# Altium PCB JLINK_V9_RST.PcbDoc
Units mm, origin at the board's own origin, x right, y up, seen from the top; angles counter-clockwise.
Board outline 35.79 x 32.89 mm, 2 copper layers (Top Layer, Bottom Layer); 49 components, 39 nets, 208 pads, 107 vias.
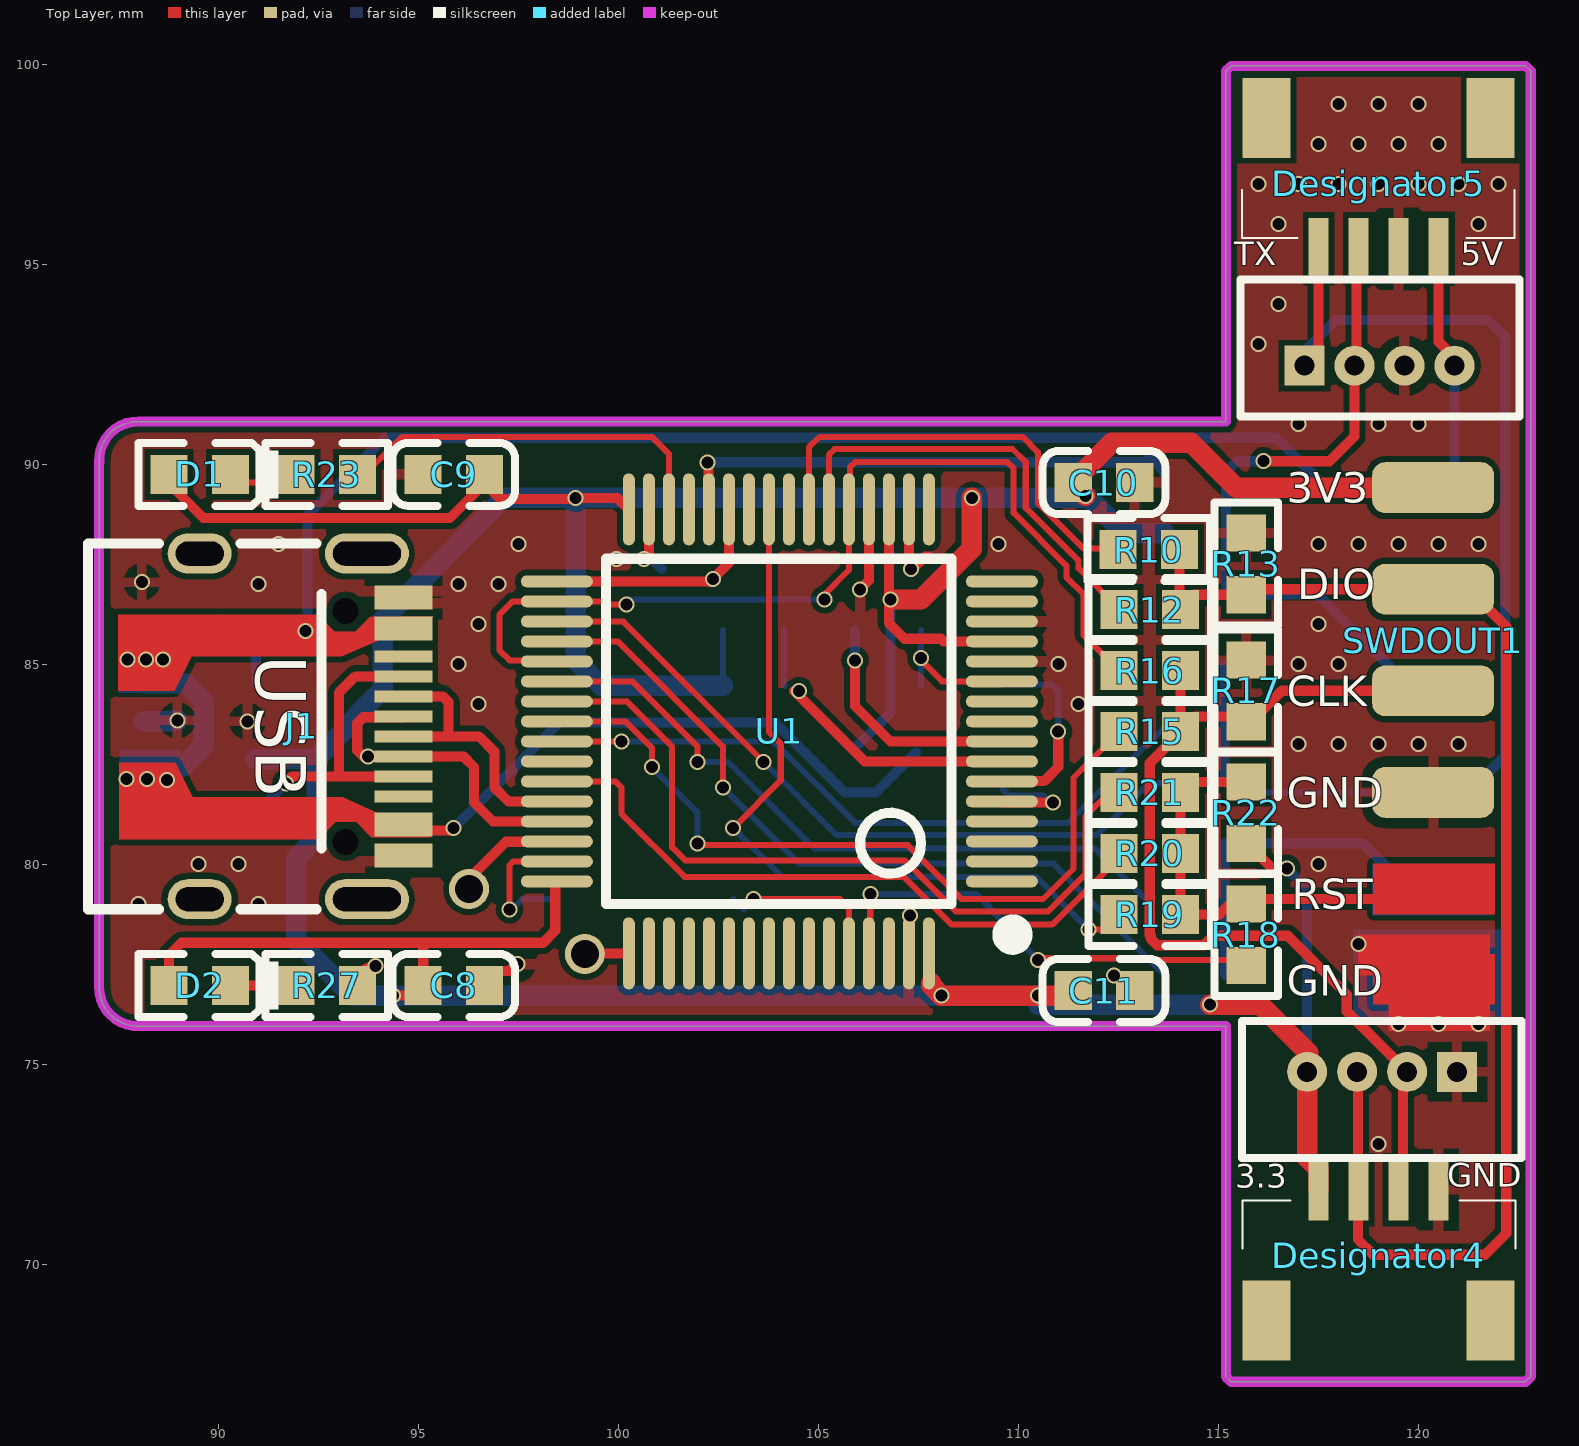
[diagram p0: Top Layer view]
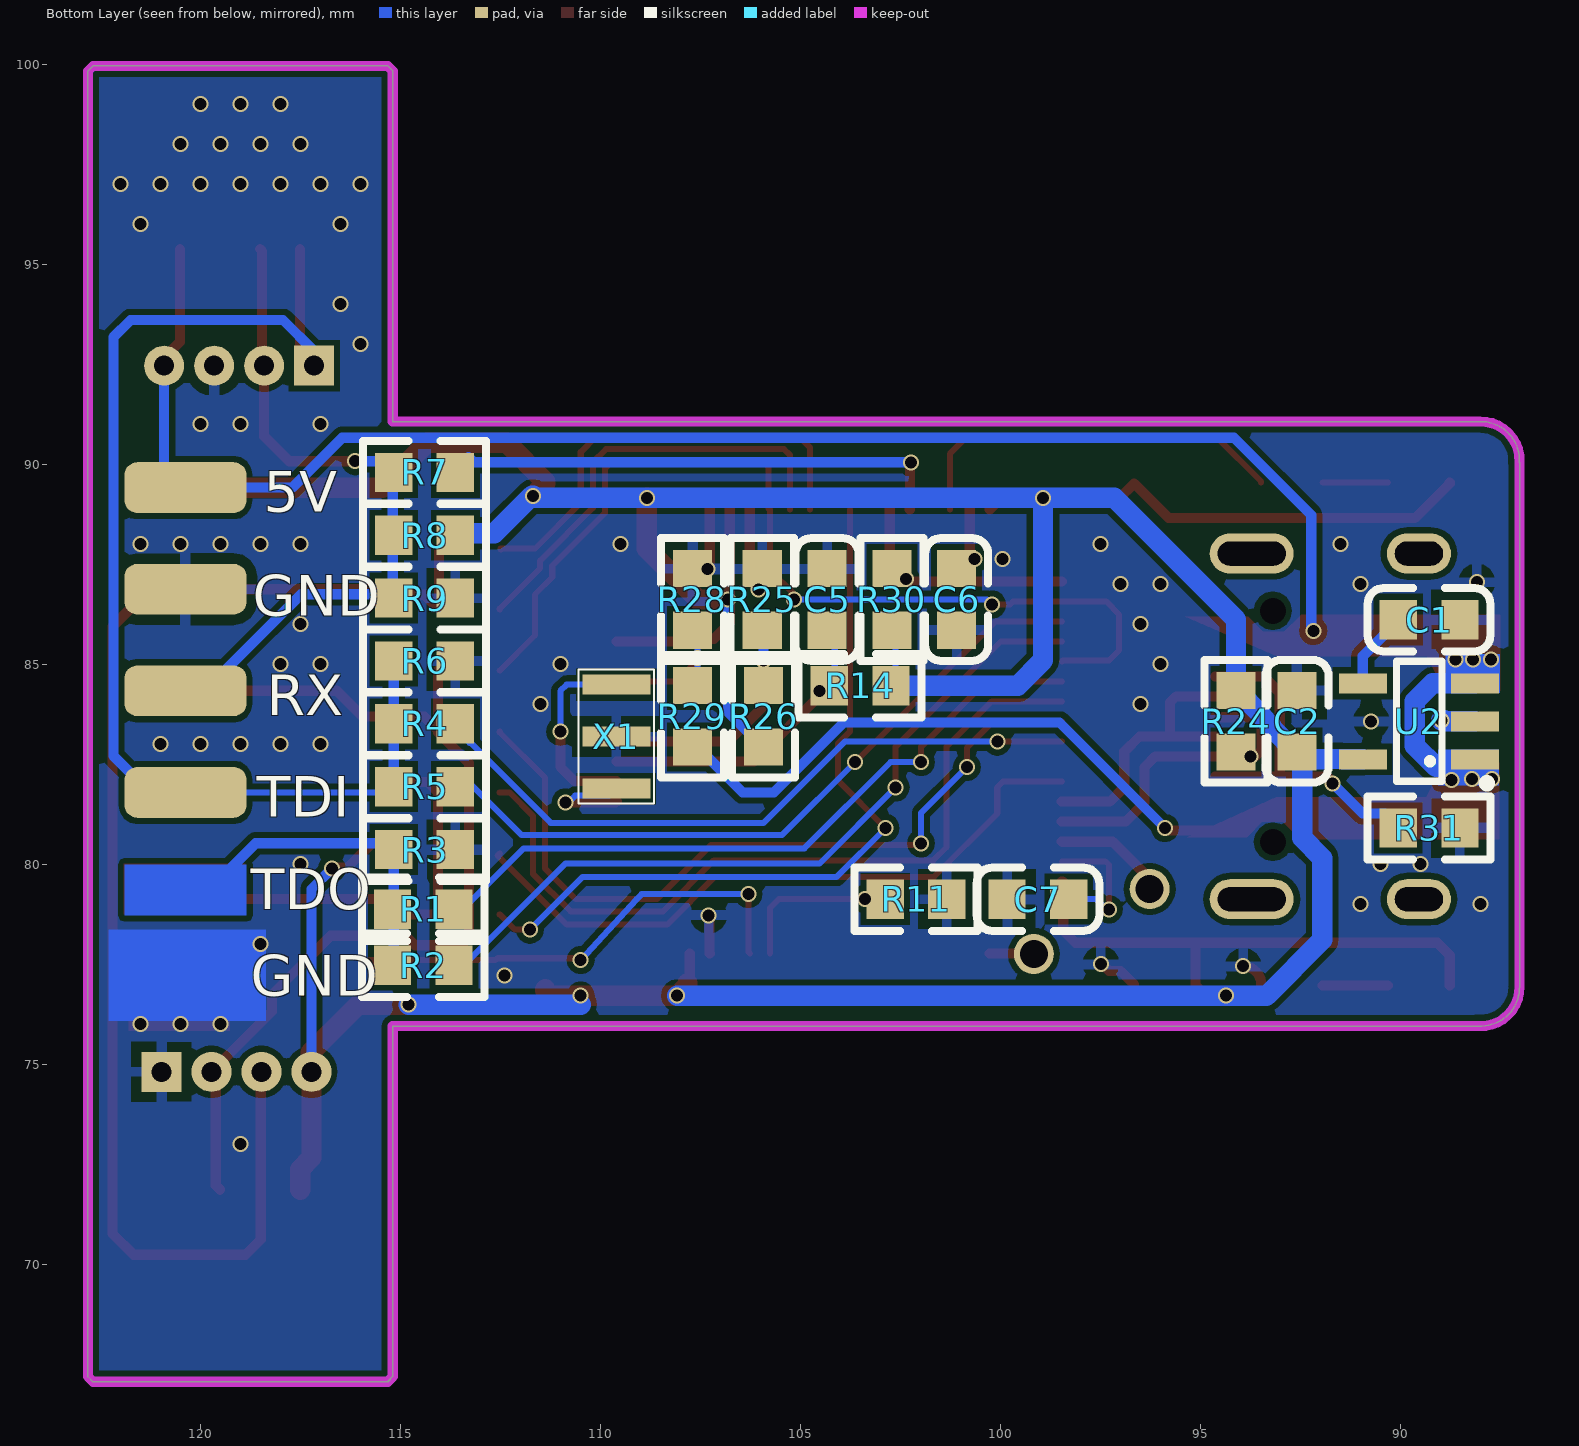
[diagram p1: Bottom Layer view, seen from below]
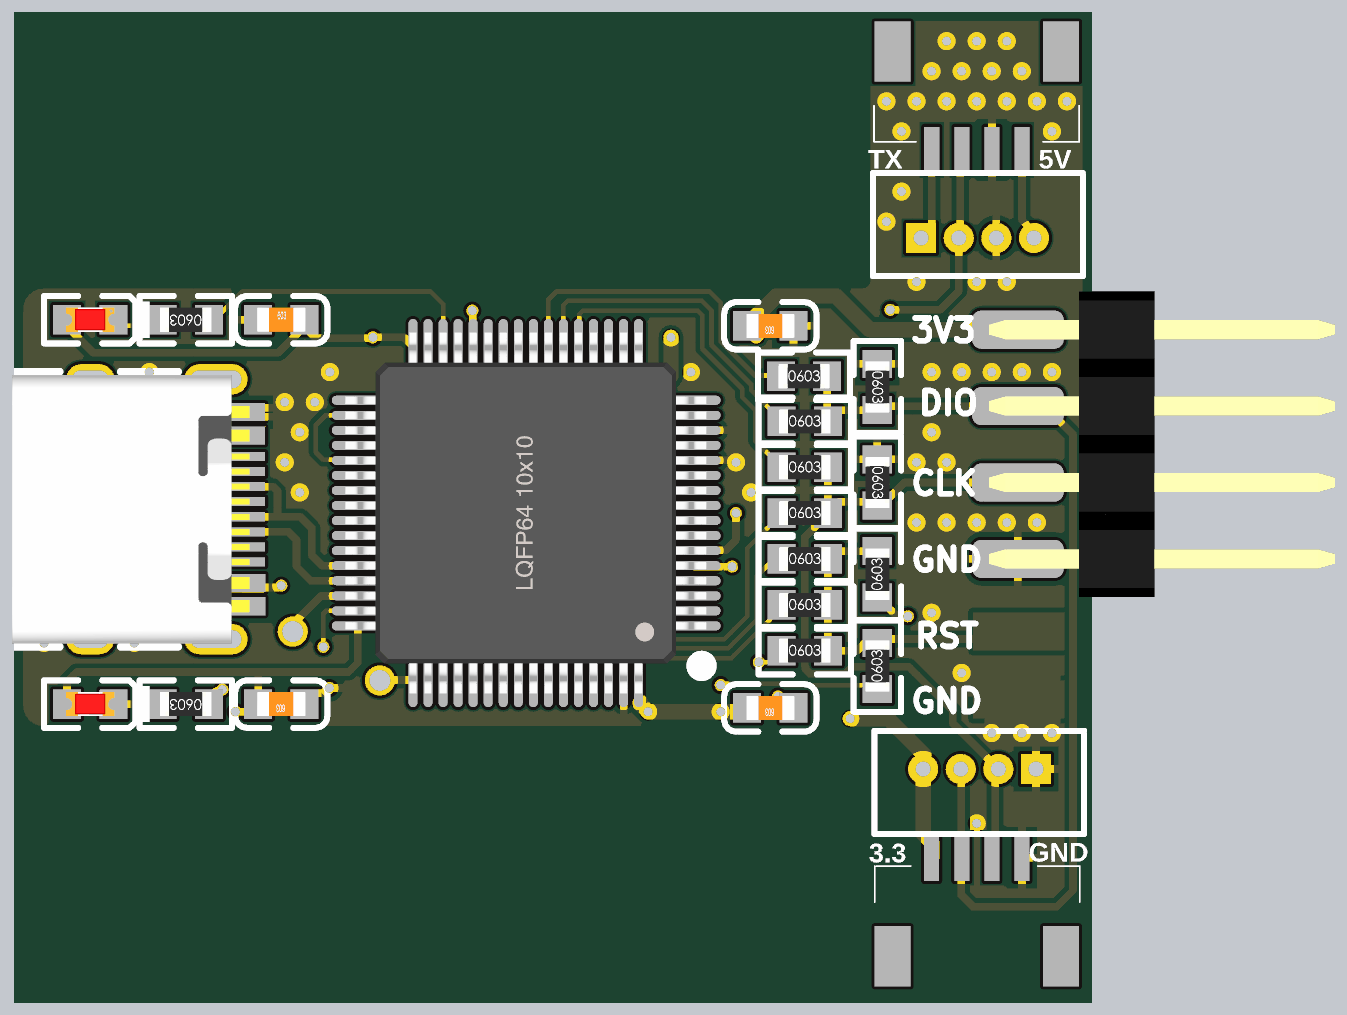
[diagram p2: 3D render of the assembled board from above, using the file's embedded part models]
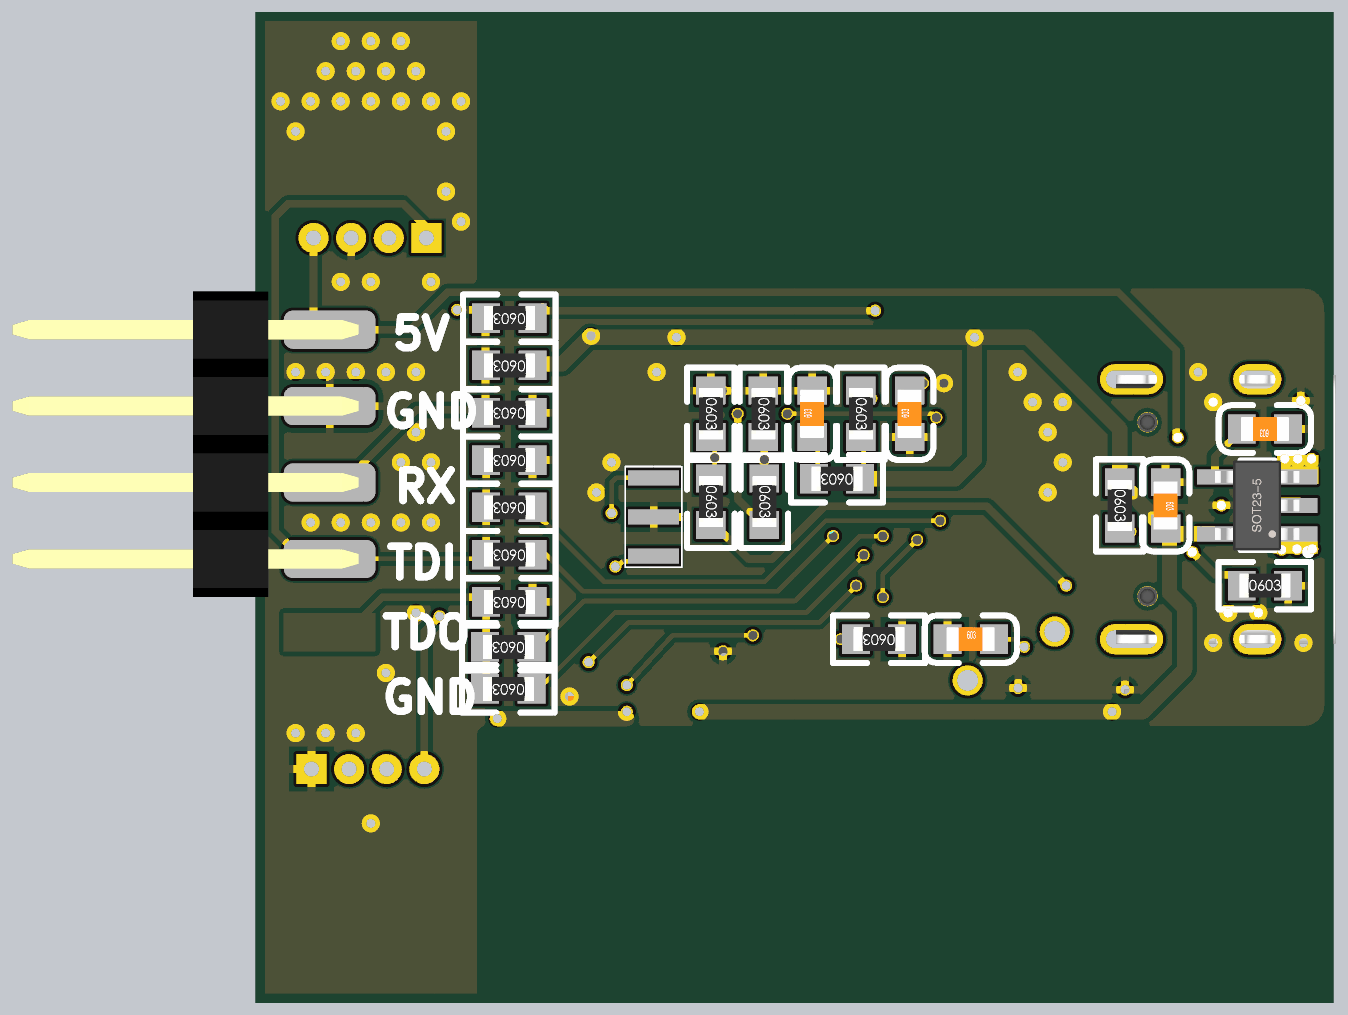
[diagram p3: 3D render of the assembled board from below, using the file's embedded part models]

## Layer stack, top to bottom
Top Solder: solder mask 0.0102, Solder Resist, Dk 3.5
Top Layer: signal copper 0.0356
Dielectric 1: dielectric 0.32, FR-4, Dk 4.8
Bottom Layer: signal copper 0.0356
Bottom Solder: solder mask 0.0102, Solder Resist, Dk 3.5

## Board outline
87.02,76.939 ccw(c87.986,76.913) 88.036,75.949 88.011,75.948 115.189,75.948 115.189,67.185 115.316,67.058 122.682,67.058 122.809,67.185 122.809,99.824 122.682,99.951 115.316,99.951 115.189,99.824 115.189,91.061 88.011,91.061 ccw(c87.986,90.096) 87.021,90.045 87.02,90.045

## Design rules (kind name [scope] priority, off if disabled: settings)
Clearance [All] p1: gap=0.152 ignorepadtopadclearanceinfootprint=FALSE
PolygonConnect [All] p1: connectstyle=Relief reliefconductorwidth=0.254 reliefentries=4 polygonreliefangle="90 Angle" airgapwidth=0.254
RoutingVias [All] p1: holewidth=0.3 width=0.4 viastyle="Through Hole" minholewidth=0.3 minwidth=0.4 maxholewidth=0.3 maxwidth=0.4
SolderMaskExpansion [All] p1: expansion=0.102
Width [All] p1: maxlimit=0.508 minlimit=0.152 preferedwidth=0.254
30 further rules are at their usual default settings.

## Components (designator, comment, footprint, x,y, rotation, side; value= is the part's Value field where it differs from the comment)
C1 "2.2UF" LC-0603_C 89.281,86.108 r0 bottom value=2.2uf
C2 "104" LC-0603_C 92.583,83.568 r270 bottom
C5 "104" LC-0603_C 104.331,86.614 r90 bottom
C6 "2.2UF" LC-0603_C 101.092,86.614 r90 bottom value=2.2uf
C7 "2.2UF" LC-0603_C 99.06,79.121 r180 bottom value=2.2uf
C8 "104" LC-0603_C 95.885,76.964 r180 top
C9 "104" LC-0603_C 95.885,89.74 r0 top
C10 "104" LC-0603_C 112.141,89.537 r180 top
C11 "104" LC-0603_C 112.141,76.837 r180 top
D1 "白灯 0603" 0603_LED_S1 89.535,89.74 r180 top
D2 "白灯 0603" 0603_LED_S1 89.535,76.964 r180 top
Designator4 "Comment" 1.0MM插座_4P 116.205,68.582 r0 top
Designator5 "Comment" 1.0MM插座_4P 121.807,98.654 r180 top
J1 "USB type C" "USB Type-C-16Pin_A" 89.535,83.441 r270 top
R1 "100R" LC-0603_R 114.427,78.867 r0 bottom value=101
R2 "100R" LC-0603_R 114.427,77.47 r0 bottom value=101
R3 "NC" LC-0603_R 114.395,80.361 r0 bottom value=220K
R4 "100R" LC-0603_R 114.395,83.504 r0 bottom value=101
R5 "100R" LC-0603_R 114.395,81.933 r0 bottom value=101
R6 "10K" LC-0603_R 114.395,85.076 r0 bottom
R7 "100R" LC-0603_R 114.395,89.791 r0 bottom value=101
R8 "10K" LC-0603_R 114.395,88.219 r0 bottom
R9 "10K" LC-0603_R 114.395,86.648 r0 bottom
R10 "100R" LC-0603_R 113.26,87.861 r0 top value=101
R11 "10K" LC-0603_R 102.108,79.121 r0 bottom value=10K.
R12 "100R" LC-0603_R 113.284,86.36 r0 top value=101
R13 "10K" LC-0603_R 115.697,87.503 r270 top
R14 "10K" LC-0603_R 103.505,84.455 r0 bottom
R15 "100R" LC-0603_R 113.284,83.312 r0 top value=101
R16 "100R" LC-0603_R 113.284,84.836 r0 top value=101
R17 "10K" LC-0603_R 115.697,84.328 r270 top
R18 "10K" LC-0603_R 115.697,78.232 r90 top
R19 "100R" LC-0603_R 113.284,78.74 r0 top value=101
R20 "100R" LC-0603_R 113.284,80.264 r0 top value=101
R21 "10K" LC-0603_R 113.284,81.788 r0 top value=101
R22 "10K" LC-0603_R 115.697,81.28 r90 top
R23 "1K" LC-0603_R 92.71,89.74 r180 top value=102
R24 "1.5K" LC-0603_R 94.107,83.568 r270 bottom
R25 "10K" LC-0603_R 105.95,86.614 r270 bottom
R26 "10K" LC-0603_R 105.918,83.693 r270 bottom
R27 "1K" LC-0603_R 92.71,76.964 r180 top value=102
R28 "10K" LC-0603_R 107.696,86.614 r270 bottom value=103
R29 "10K" LC-0603_R 107.696,83.693 r270 bottom
R30 "10K" LC-0603_R 102.711,86.614 r270 bottom
R31 "10K" LC-0603_R 89.281,80.901 r180 bottom
SWDOUT1 "HDR2x6_2.54" HDR2X4_2.54_180H 120.371,89.41 r0 top
U1 "STM32F205RET6" "LQFP64 10x10_N" 104.013,83.314 r90 top
U2 "RT9193-3.3" SOT23-5N 89.538,83.568 r90 bottom
X1 "8MHz" 3脚晶振 109.601,83.185 r270 bottom

## Footprints (in the part's own frame and the unit in brackets; to place one, negate y for a bottom-side part, rotate by r counter-clockwise, add the part's x,y. Pads: shape width x height; smd on the part's side, far side on the other; paste and mask are expansions set on the pad)
1.0MM插座_4P [mm] "间距1.0mm"
  rect 0.5x1.55 smd: 1(4.3,3.275) 2(3.3,3.275) 3(2.3,3.275) 4(1.3,3.275)
  rect 1.2x2 smd: 5(0,0) 6(5.6,0)
  silkscreen extent -0.6,1.8 6.22,3
3脚晶振 [mm]
  rect 0.5x1.7 smd: 1(1.3,0) 2(-1.3,0) 3(0,0)
  silkscreen extent -1.68,-0.94 1.68,0.94
0603_LED_S1 [mm]
  rect 0.93x0.98 smd: A(0.77,0) K(-0.77,0)
  silkscreen extent -1.97,-0.79 1.54,0.79, body extent -0.8,-0.4 0.8,0.4, height 0.6
HDR2X4_2.54_180H [mil]
  rrect50% 120x50 smd: 1(0,0) 3(0,-100) 5(0,-200) 7(0,-300)
  rrect50% 120x50 smd far side: 2(0,0) 4(0,-100) 6(0,-200) 8(0,-300)
  body extent -38,-350 415,50, height 78
LC-0603_C [mm]
  rect 0.93x0.98 smd: 1(-0.77,0) 2(0.77,0)
  silkscreen extent -1.53,-0.79 1.54,0.79, body extent -0.8,-0.4 0.8,0.4, height 0.3
LC-0603_R [mm]
  rect 0.93x0.98 smd: 1(-0.77,0) 2(0.77,0)
  silkscreen extent -1.53,-0.79 1.54,0.79, body extent -0.85,-0.4 0.85,0.4, height 0.56
"LQFP64 10x10_N" [mm] "64脚，体宽10x10mm，脚距0.5mm"
  oval 0.3x1.8 smd: 1(-3.75,-5.575) 2(-3.25,-5.575) 3(-2.75,-5.575) 4(-2.25,-5.575) 5(-1.75,-5.575) 6(-1.25,-5.575) 7(-0.75,-5.575) 8(-0.25,-5.575) 9(0.25,-5.575) 10(0.75,-5.575) 11(1.25,-5.575) 12(1.75,-5.575) 13(2.25,-5.575) 14(2.75,-5.575) 15(3.25,-5.575) 16(3.75,-5.575) 33(3.75,5.55) 34(3.25,5.55) 35(2.75,5.55) 36(2.25,5.55) 37(1.75,5.55) 38(1.25,5.55) 39(0.75,5.55) 40(0.25,5.55) 41(-0.25,5.55) 42(-0.75,5.55) 43(-1.25,5.55) 44(-1.75,5.55) 45(-2.25,5.55) 46(-2.75,5.55) 47(-3.25,5.55) 48(-3.75,5.55)
  oval 1.8x0.3 smd: 17(5.55,-3.75) 18(5.55,-3.25) 19(5.55,-2.75) 20(5.55,-2.25) 21(5.55,-1.75) 22(5.55,-1.25) 23(5.55,-0.75) 24(5.55,-0.25) 25(5.55,0.25) 26(5.55,0.75) 27(5.55,1.25) 28(5.55,1.75) 29(5.55,2.25) 30(5.55,2.75) 31(5.55,3.25) 32(5.55,3.75) 49(-5.55,3.75) 50(-5.55,3.25) 51(-5.55,2.75) 52(-5.55,2.25) 53(-5.55,1.75) 54(-5.55,1.25) 55(-5.55,0.75) 56(-5.55,0.25) 57(-5.55,-0.25) 58(-5.55,-0.75) 59(-5.55,-1.25) 60(-5.55,-1.75) 61(-5.55,-2.25) 62(-5.55,-2.75) 63(-5.55,-3.25) 64(-5.55,-3.75)
  silkscreen extent -5.33,-6.09 4.32,4.32, body extent -6,-6 6,6, height 1.45
SOT23-5N [mm] "3x1.6x1.1mm(长宽高)"
  rect 0.5x1.2 smd: 1(-0.95,-1.4) 2(0,-1.4) 3(0.95,-1.4) 4(0.95,1.4) 5(-0.95,1.4)
  silkscreen extent -1.63,-1.78 1.5,0.56, body extent -1.5,-1.4 1.5,1.4, height 1.15
"USB Type-C-16Pin_A" [mm]
  round 0 hole 0.65: 0(-2.89,3.65) 0(2.89,3.65)
  oval 1x2.1 hole 0.6 slot 1.7 at 90 deg: 1(-4.32,4.18) 1(4.32,4.18)
  oval 1x1.6 hole 0.6 slot 1.2 at 90 deg: 1(-4.32,0) 1(4.32,0)
  rect 0.3x1.45 smd: A1(-3.375,5.092) A4(-2.6,5.092) A5(-1.25,5.092) A6(-0.25,5.092) A7(0.25,5.092) A8(-1.75,5.092) A9(2.6,5.1) A12(3.375,5.1) B1(3.075,5.1) B4(2.3,5.1) B5(1.75,5.092) B6(0.75,5.092) B7(-0.75,5.092) B8(1.25,5.092) B9(-2.3,5.092) B12(-3.075,5.092)
  silkscreen extent -4.57,-2.79 4.57,3.05, body extent -4.47,-2.6 4.47,5.3, height 3.25

## Part data
C1 C2 C5 C6 C7 C8 C9 C10 C11: library part Cap, "Polarized Capacitor (Radial)", Published=8-Jun-2000, Publisher="Altium Limited", Revision="July-2002: Re-released for DXP Platform."
D1 D2: library part "0603 白灯", "发光二极管", Package=0603, SuppliersPartNumber=C2290, ComponentLink1Description=供应商链接, ComponentLink1URL=http://www.szlcsc.com/product/details_2663.html, Supplier=LC
J1: library part USB_C
R1 R2 R3 R4 R5 R6 R7 R8 R9 R10 R11 R12 R13 R14 R15 R16 R17 R18 R19 R20 R21 R22 R23 R25 R26 R27 R28 R29 R30: library part Resistor, "Resistor Chip", Published=8-Jun-2000, Publisher="Altium Limited", Revision="July-2002: Re-released for DXP Platform."
R24 R31: library part Res2, "Resistor", LatestRevisionDate=17-Jul-2002, LatestRevisionNote="Re-released for DXP Platform.", PackageReference=AXIAL-0.4, Published=8-Jun-2000, Publisher="Altium Limited"
SWDOUT1: library part HDR2x4_2.54, "Header"
U1: "Microcontroller   ST", Brand=ST, Code=104261, InitialReleaseDate=25-Mar-2015, LatestRevisionDate=25-Mar-2015, PackageReference=SQFP10x10-64, Vision=V5.0
U2: library part RT9193-33, "3.3V超低压差LDO"
X1: library part XTAL-3P, "3脚无源晶振", BOM名称=2脚晶振, 学习资源=www.ooocke.com, 版权归属=源创客

## Free pads (board coordinates)
  rect 1x1 hole 0.5: 1(117.154,92.458) 1(120.971,74.805)
  round 1 hole 0.5: 2(118.404,92.458) 2(119.721,74.805) 3(118.471,74.805) 3(119.654,92.458) 4(117.221,74.805) 4(120.904,92.458)
  round 1 hole 0.7: 5(96.266,79.375) 5(99.162,77.751)

## Via types
v1: diameter 0.4, hole 0.3, Top Layer to Bottom Layer, 107 vias

## Nets (pads, with @x,y where several pads share a name; then routed paths per layer and width w, separated by ;. In a path a pad name is that pad's centre, name@x,y a point inside that pad or via, vN(x,y) a via of type N, cw(c..) or ccw(c..) an arc to the next point about the centre after c; other vN are vias at no path point)
3V3: C2.2 C8.2 C9.2 C10.2 C11.2 D1.A D2.A Designator4.4 pad.4@117.221,74.805 R8.1 R14.1 R22.1 R24.1 R26.2 R30.2 SWDOUT1.1 U1.13 U1.19 U1.32 U1.48 U1.64 U2.5 | length 130.1
  Top Layer w0.152: U1.13@109.57,85.582 U1.13
  Top Layer w0.254: D2.A 88.765,77.718 89.078,78.031 98.12,78.031 98.425,78.336 98.425,79.543 98.446,79.564 U1.48 ; D1.A@88.765,89.537 88.765,89.512 89.629,88.648 95.791,88.648 96.655,89.512 97.044,89.123 98.902,89.123 v1(98.933,89.154) 99.973,89.154 U1.32 ; v1(94.361,76.71) 94.861,76.71 C8.2 95.123,76.972 95.123,77.98 ; U1.19@106.754,88.855 U1.19 106.763,86.023 107.157,85.629 107.367,85.629 107.37,85.633 108.064,85.633 108.133,85.564 U1.13 ; U1.64 107.763,77.026 U1.64@107.791,76.998 ; R22.1 115.722,80.51 116.321,79.911 116.685,79.911 v1(116.713,79.883)
  Top Layer w0.508: v1@106.934,86.614 107.569,86.614 108.839,87.884 v1(108.839,89.154) ; U1.64@107.819,77.026 107.819,76.968 v1(108.077,76.71) v1(110.49,76.71) 111.244,76.71 C11.2 ; C11.2@111.375,76.841 C11.2@111.375,76.866 ; v1(111.677,89.206) 111.371,89.512 C10.2 111.371,89.562 112.337,90.528 114.327,90.528 115.445,89.41 SWDOUT1.1 ; v1(114.796,76.481) 116.051,76.481 117.246,75.286 117.246,74.83 117.221,74.805 117.221,72.658 117.505,72.374 Designator4.4
  Bottom Layer w0.152: R14.1@102.608,84.455 102.616,84.463 R30.2@102.616,85.844
  Bottom Layer w0.254: R26.2 105.943,82.923 106.807,83.787 v1(106.807,86.614) ; v1(116.713,79.883) 117.221,79.375 pad.4@117.221,74.805
  Bottom Layer w0.508: U2.5 90.942,82.622 91.44,82.622 91.443,82.625 91.945,82.625 91.948,82.622 92.407,82.622 C2.2@92.453,82.668 ; R14.1@102.608,84.455 99.568,84.455 98.933,85.09 v1(98.933,89.154) ; v1(108.077,76.71) v1(94.361,76.71) 93.345,76.71 91.948,78.107 91.948,80.147 92.453,80.653 C2.2@92.453,82.668 ; 110.49,76.481 v1(114.796,76.481) ; R8.1@113.657,88.267 112.649,88.267 111.71,89.206 v1(111.677,89.206) 111.625,89.154 v1(108.839,89.154) v1(98.933,89.154) ; C2.2@92.453,82.668 C2.2 92.608,82.798 93.211,83.401 93.211,83.436 93.479,83.705 93.479,83.735 94.082,84.338 R24.1 94.107,86.108 97.153,89.154 v1(98.933,89.154)
5V: Designator5.4 J1.A4 J1.A9 J1.B4 J1.B9 pad.4@120.904,92.458 R29.2 SWDOUT1.2 U2.1 U2.3 | length 57.8
  Top Layer w0.254: J1.A9 95.785,80.841 95.845,80.901 v1(95.885,80.901) ; Designator5.4 120.507,93.057 120.904,92.66 pad.4@120.904,92.458
  Bottom Layer w0.254: v1(92.177,85.829) 92.227,85.879 92.227,88.724 94.158,90.655 116.454,90.655 117.698,89.41 SWDOUT1.2 120.65,89.41 120.904,89.664 pad.4@120.904,92.458 ; v1(95.885,80.901) 98.521,83.537 103.915,83.537 105.664,81.788 106.44,81.788 R29.2@107.442,82.79
  Bottom Layer w0.508: U2.3 89.187,84.518 89.637,84.068 89.637,82.958 89.103,82.425 88.798,82.425
  other v1: 88.722,82.095 87.706,82.12 88.214,82.12 87.732,85.117 88.189,85.117 88.621,85.117
cc1: J1.A5 J1.B8 R31.1 | length 9
  Top Layer w0.254: v1(91.694,82.019) 91.694,82.042 91.843,82.191 93.015,82.191 ; J1.B8 93.015,82.191 ; J1.A5 93.427,84.691 93.015,84.279 93.015,82.191
  Bottom Layer w0.254: R31.1 90.051,80.926 90.389,81.264 90.939,81.264 v1(91.694,82.019)
GND: C1.1 C2.1 C5.2 C6.1 C7.1 C8.1 C9.1 C10.1 C11.1 Designator4.1 Designator5.3 J1.A1 J1.A12 J1.B1 J1.B12 pad.1@120.971,74.805 pad.3@119.654,92.458 R3.1 R6.1 R9.1 R11.1 R13.1 R17.1 R25.1 R27.1 R28.1 R31.2 SWDOUT1.4 SWDOUT1.7 U1.12 U1.14 U1.18 U1.20 U1.63 U2.2 X1.3 | length 7.8
  Top Layer w0.254: R27.1 93.48,76.997 cw(c93.929,76.997) v1(93.929,77.447) ; C8.1 96.655,76.989 96.993,77.327 97.275,77.327 97.446,77.497 v1(97.485,77.497) ; v1(106.045,86.868) 106.263,87.086 U1.20 ; U1.63 107.272,77.773 107.272,78.697 v1@107.315,78.74 ; U1.18 107.263,87.468 107.315,87.416 v1(107.315,87.376) 107.355,87.376 107.663,87.685 107.763,87.685
  Bottom Layer w0.508: U2.2 88.142,83.572 88.879,83.572 88.9,83.593 v1(88.976,83.593)
  other v1: 119,73 119.5,76 120.5,76 121.5,76 112.395,77.216 118.5,78 107.293,78.718 88,79 91,79 89.5,80 90.5,80 117.5,80 117,83 118,83 119,83 120,83 121,83 90.729,83.568 96.5,84 111.5,84 96,85 111,85 117,85 118,85 96.5,86 117.5,86 91,87 96,87 97,87 88.087,87.048 99.949,87.63 91.5,88 97.5,88 109.5,88 117.5,88 118.5,88 119.5,88 120.5,88 121.5,88 117,91 119,91 120,91 116,93 116.5,94 116.5,96 121.5,96 116,97 117,97 118,97 119,97 120,97 121,97 122,97 117.5,98 118.5,98 119.5,98 120.5,98 118,99 119,99 120,99
LED: R23.1 U1.30 | length 9.8
  Top Layer w0.152: R23.1@93.48,89.537 93.48,89.562 94.598,90.68 100.838,90.68 101.263,90.255 U1.30
NetC1_2: C1.2 U2.4 | length 2
  Bottom Layer w0.254: C1.2 90.051,86.083 90.938,85.196 U2.4
NetC5_1: C5.1 R14.2 U1.7 | length 7.3
  Top Layer w0.254: v1@104.394,84.328 106.158,82.564 U1.7
  Bottom Layer w0.152: C5.1@104.14,85.844 104.14,84.463 R14.2@104.148,84.455
  other v1: 104.521,84.328
NetC6_2: C6.2 U1.31 | length 1.8
  Top Layer w0.254: v1@100.711,87.632 100.763,87.684 U1.31
  Bottom Layer w0.254: v1(100.643,87.63) 100.83,87.63 101.084,87.376 C6.2
NetC7_2: C7.2 U1.47 | length 3.3
  Top Layer w0.152: v1@97.282,78.994 97.282,79.975 97.371,80.064 U1.47
  Bottom Layer w0.152: v1(97.282,78.867) 97.342,78.867 97.596,79.121 C7.2
NetD1_K: D1.K R23.2 | length 1.6
  Top Layer w0.152: D1.K@90.305,89.537 R23.2@91.94,89.537
NetD2_K: D2.K R27.2 | length 1.6
  Top Layer w0.254: D2.K R27.2
NetJ1_0: 
NetR11_2: R11.2 U1.60 | length 4.3
  Top Layer w0.152: v1(103.378,79.121) 105.537,79.121 105.763,78.895 U1.60
  Bottom Layer w0.152: R11.2 103.132,78.867 103.378,79.113 v1(103.378,79.121)
OSC1: U1.5 X1.1 | length 2.7
  Top Layer w0.254: U1.5 109.618,81.534 v1(110.871,81.534)
  Bottom Layer w0.152: X1.1 109.775,81.711 110.627,81.711 110.804,81.534 v1(110.871,81.534)
OSC2: U1.6 X1.2 | length 4.9
  Top Layer w0.254: U1.6 109.597,82.073 110.646,82.073 110.998,82.425 v1(110.998,83.312)
  Bottom Layer w0.152: X1.2 110.841,84.485 110.998,84.328 v1(110.998,83.312)
PA5: R16.1 U1.21 U1.34 U1.37 | length 24.7
  Top Layer w0.152: U1.37 98.435,85.092 97.282,85.092 97.028,85.346 97.028,86.235 97.357,86.564 U1.34 99.678,86.564 99.755,86.487 v1(100.203,86.487) ; v1(105.156,86.614) 105.156,86.743 105.763,87.35 U1.21 105.791,88.892 105.791,89.918 105.918,90.045 109.728,90.045 109.88,89.893 109.88,88.776 111.201,87.456 111.201,87.173 111.633,86.741 111.633,85.717 R16.1
  Bottom Layer w0.152: v1(100.203,86.487) 100.33,86.614 v1(105.156,86.614)
PA6: R12.1 U1.22 | length 11.1
  Top Layer w0.152: U1.22 105.263,90.228 105.41,90.375 109.855,90.375 110.185,90.045 110.185,88.903 111.506,87.582 111.506,87.393 112.514,86.385 R12.1
PA7: R10.1 U1.23 | length 11.3
  Top Layer w0.152: U1.23 104.763,90.414 105.029,90.68 110.109,90.68 110.49,90.299 110.49,89.029 111.633,87.886 112.49,87.886 R10.1
PA8: R4.1 U1.41 | length 17.1
  Top Layer w0.152: U1.41 98.469,83.058 v1(100.076,83.058)
  Bottom Layer w0.152: v1(100.076,83.058) 103.886,83.058 105.918,81.026 111.242,81.026 113.243,83.027 113.268,83.027 113.657,83.416 R4.1@113.657,83.441
PA10: R20.1 U1.43 | length 16.8
  Top Layer w0.152: U1.43 99.927,82.064 100.076,81.915 100.076,81.259 101.658,79.677 107.14,79.677 108.331,78.486 110.844,78.486 112.568,80.21 R20.1
PB1: R30.1 U1.27 U1.33 | length 5.8
  Top Layer w0.254: U1.33 102.302,87.064 v1(102.362,87.124) 102.763,87.525 U1.27
PB2: R7.1 U1.28 | length 12.8
  Top Layer w0.254: v1(102.235,90.043) 102.254,90.024 102.254,88.873 U1.28
  Bottom Layer w0.254: v1(102.235,90.043) 113.164,90.043 113.293,90.172 113.649,89.816 R7.1@113.649,89.791
PB8: R18.1 U1.61 | length 12.3
  Top Layer w0.152: U1.61 106.299,77.8 v1(106.299,79.248) ; v1(110.49,77.597) 110.538,77.645 112.573,77.645 112.62,77.597 115.832,77.597 R18.1 115.633,77.399 R18.1@115.443,77.589
  Bottom Layer w0.152: v1(106.299,79.248) 108.966,79.248 109.093,79.121 v1(110.49,77.597)
PB14: R5.1 U1.35 | length 17.9
  Top Layer w0.152: U1.35 99.639,86.064 99.644,86.058 100.124,86.058 v1(103.632,82.55)
  Bottom Layer w0.152: v1(103.632,82.55) 105.461,80.721 111.963,80.721 113.261,82.019 R5.1@113.657,82.019
PB15: R2.1 U1.36 | length 19.2
  Top Layer w0.152: U1.36 99.983,85.564 102.616,82.931 v1(102.616,81.915)
  Bottom Layer w0.152: v1(102.616,81.915) 104.521,80.01 110.874,80.01 113.641,77.243 R2.1@113.641,77.218
PC0: R25.2 R26.1 U1.8 | length 6.6
  Top Layer w0.254: v1(105.918,85.09) 105.918,83.949 106.803,83.064 U1.8
  Bottom Layer w0.152: v1(105.918,85.09) R26.1 R26.1@105.926,84.455
  Bottom Layer w0.254: v1(105.918,85.09) R25.2@105.918,85.838
PC3: R28.2 R29.1 U1.11 | length 3.6
  Top Layer w0.152: v1@107.568,85.091 108.095,84.564 U1.11
  Bottom Layer w0.152: R29.1@107.569,84.463 v1(107.569,85.154) R28.2@107.569,85.844
PC5: R19.1 U1.25 | length 19.4
  Top Layer w0.152: v1(102.87,80.899) 104.061,82.09 104.061,83.01 103.763,83.308 U1.25 ; v1(111.76,78.359) 112.133,78.359 R19.1
  Bottom Layer w0.152: v1(102.87,80.899) 104.092,79.677 110.442,79.677 v1(111.76,78.359)
PC7: R1.1 U1.38 | length 17.3
  Top Layer w0.152: U1.38 100.348,84.564 101.981,82.931 v1(101.981,82.55)
  Bottom Layer w0.152: v1(101.981,82.55) 102.743,82.55 104.902,80.391 111.916,80.391 R1.1@113.26,79.047 ; R1.1@113.681,78.946 R1.1@113.681,78.971
PC8: R21.1 U1.39 | length 19.8
  Top Layer w0.152: U1.39 100.213,84.064 101.346,82.931 101.346,80.42 101.676,80.089 107.159,80.089 108.432,78.816 110.743,78.816 111.684,79.757 111.684,81.204 112.268,81.788 R21.1
PC9: R15.1 U1.40 | length 19.7
  Top Layer w0.152: U1.40 100.176,83.564 100.838,82.902 v1(100.838,82.423) ; v1(101.981,80.518) 102.029,80.47 107.236,80.47 108.585,79.121 110.617,79.121 111.379,79.883 111.379,82.152 112.514,83.287 R15.1
  Bottom Layer w0.152: v1(100.838,82.423) 101.981,81.28 v1(101.981,80.518)
RST: R18.2 R19.2 R20.2 R21.2 R22.2 | length 10.7
  Top Layer w0.254: R22.2@115.443,82.05 114.316,82.05 R21.2 R20.2 R19.2 115.029,78.74 115.418,79.129 115.443,79.129 120.007,79.129 120.015,79.121
RXD: Designator5.2 pad.2@118.404,92.458 R7.2 R8.2 R9.2 SWDOUT1.6 | length 17.8
  Top Layer w0.254: v1(116.129,90.07) 117.78,90.07 118.404,90.695 118.404,92.458 118.455,92.509 118.455,95.327 Designator5.2
  Bottom Layer w0.254: v1(116.129,90.07) 115.468,90.07 115.189,89.791 115.189,86.743 117.475,86.743 119.888,84.33 SWDOUT1.6@120.65,84.33
TCK: Designator4.2 pad.2@119.721,74.805 R15.2 R16.2 R17.2 SWDOUT1.5 | length 25
  Top Layer w0.254: R16.2 R15.2@114.054,83.337 ; Designator4.2 119.613,71.965 119.613,74.697 119.721,74.805 118.209,76.317 118.209,76.736 116.739,78.206 114.871,78.206 114.635,77.971 113.473,77.971 113.31,78.134 113.31,78.206 113.284,78.232 113.284,82.517 114.054,83.287 R15.2 R15.2@114.054,83.337 ; SWDOUT1.5 116.588,84.33 115.943,83.685 114.402,83.685 R15.2@114.054,83.337
TDI-Y: Designator5.1 pad.1@117.154,92.458 R4.2 R5.2 R6.2 SWDOUT1.8 | length 29.8
  Top Layer w0.254: pad.1@117.154,92.458 117.507,92.811 Designator5.1
  Bottom Layer w0.152: R5.2@115.197,82.044 115.451,81.79 SWDOUT1.8
  Bottom Layer w0.254: R5.2@115.165,82.044 R4.2 R6.2@115.165,84.965 ; pad.1@117.154,92.458 117.154,92.823 117.932,93.601 121.742,93.601 122.174,93.169 122.174,82.704 121.26,81.79 SWDOUT1.8
TDO: R1.2 R2.2 R3.2 | length 8.6
  Bottom Layer w0.254: R2.2@115.181,77.218 115.165,77.234 115.165,78.79 115.165,80.52 118.618,80.52 119.761,79.377 ; 121.387,79.402 121.539,79.25
TMS: Designator4.3 pad.3@118.471,74.805 R10.2 R12.2 R13.2 SWDOUT1.3 | length 33.7
  Top Layer w0.254: R10.2 114.03,86.384 114.053,86.384 114.402,86.733 115.443,86.733 115.58,86.87 SWDOUT1.3 121.26,86.87 122.199,85.93 122.199,70.764 121.666,70.231 118.872,70.231 118.491,70.612 118.491,71.857 118.491,74.785 pad.3@118.471,74.805
USB_DM: J1.A7 J1.B7 U1.44 | length 7.1
  Top Layer w0.254: J1.A7 94.631,83.187 95.758,83.187 ; J1.B7 95.609,84.191 95.758,84.042 95.758,83.187 ; U1.44 97.254,81.564 96.901,81.917 96.901,82.806 96.52,83.187 95.758,83.187
USB_DP: J1.A6 J1.B6 R24.2 U1.45 | length 8.2
  Top Layer w0.254: J1.A6 94.604,83.668 93.621,83.668 93.472,83.519 93.472,82.84 93.621,82.691 J1.B6 96.127,82.691 96.393,82.425 96.393,81.536 96.865,81.064 U1.45
  other v1: 93.748,82.691
pads on no net: Designator4.5 Designator4.6 Designator5.5 Designator5.6 J1.0 J1.1 J1.A8 J1.B5 U1.1 U1.2 U1.3 U1.4 U1.9 U1.10 U1.15 U1.16 U1.17 U1.24 U1.26 U1.29 U1.42 U1.46 U1.49 U1.50 U1.51 U1.52 U1.53 U1.54 U1.55 U1.56 U1.57 U1.58 U1.59 U1.62
copper on no net: | length 3.9
  Top Layer w0.254: 96.266,79.377 96.266,79.629 97.192,80.555 98.454,80.555 98.463,80.564 ; 99.162,77.751 99.174,77.764 100.263,77.764

## Polygon pours and split planes (outlines as drawn)
GND on Bottom Layer (solid, remove dead copper, pour order 4): 84.709,104.521 85.217,105.029 127.254,105.029 127.254,64.389 124.587,61.722 122.047,64.262 84.709,64.262 84.709,104.648 85.852,105.791
no net on Bottom Layer "Bottom Layer-No Net" (solid, pour order 0): 89.205,102.796
GND on Top Layer (solid, remove dead copper, pour order 2): 85.725,104.013 86.106,104.394 126.746,104.394 126.746,67.183 124.46,64.897 85.217,64.897 85.217,103.124 86.614,104.521

## Keep-outs
Keep-Out Layer:
  lines w0.254: 87.02,90.045 87.02,76.989 87.02,76.939 ccw(c87.986,76.913) 88.036,75.949 ; 87.021,90.045 cw(c87.986,90.096) 88.011,91.061 115.189,91.061 115.189,99.824 115.316,99.951 122.682,99.951 122.809,99.824 122.809,89.791 122.809,77.218 122.809,67.185 122.682,67.058 115.316,67.058 115.189,67.185 115.189,75.948 88.011,75.948

## Other copper
Top Layer:
  rectangle net GND: 119.253,75.819 121.793,77.216
  rectangle net GND: 118.491,77.216 121.793,78.232
  rectangle net RST: 118.872,78.742 121.92,80.012
  rectangle net GND: 118.872,76.481 121.92,77.751
  region: 95.377,85.6
  region net 5V: 93.09,85.193 89.332,85.193 88.9,84.33 87.503,84.33 87.503,86.235 92.481,86.235 92.913,85.803 93.421,85.803 93.802,86.184 95.377,86.184
  region net 5V: 93.115,81.664 89.357,81.664 88.925,82.527 87.528,82.527 87.528,80.622 92.507,80.622 92.939,81.053 93.447,81.053 93.828,80.672 95.326,80.672
Bottom Layer:
  rectangle net GND: 118.364,76.073 122.301,78.359
  rectangle net TDO: 118.847,78.717 121.895,79.987
  rectangle net GND: 118.872,76.507 121.92,77.777
  rectangle net 5V: 87.503,84.279 88.875,85.244
  rectangle net 5V: 87.528,81.968 89.052,82.857

## Silkscreen, mask and mechanical layers (free items; w line width, h text height)
Top Overlay:
  lines w0.2: 115.55,91.188 115.55,94.617 122.528,94.617 122.528,91.188 115.55,91.188 ; 115.597,72.646 115.597,76.075 122.575,76.075 122.575,72.646 115.597,72.646
  text "TX" at 115.392,94.769 h1.02
  text "5V" at 121.056,94.769 h1.02
  text "3V3" at 116.713,89.027 h0.76
  text "DIO" at 116.967,86.614 h0.76
  text "CLK" at 116.713,83.947 h0.76
  text "GND" at 116.713,81.407 h0.76
  text "RST" at 116.84,78.867 h0.76
  text "GND" at 116.713,76.708 h0.76
  text "GND" at 120.726,71.732 h1.02
  text "3.3" at 115.418,71.706 h1.02
Bottom Overlay:
  text "5V" at 118.415,88.8 h1.02
  text "GND" at 118.694,86.21 h1.02
  text "RX" at 118.339,83.72 h1.02
  text "TDI" at 118.593,81.18 h1.02
  text "TDO" at 118.745,78.867 h1.02
  text "GND" at 118.745,76.708 h1.02
Mechanical 15:
  circle w0.05: c119.039,92.458 r0.35
  circle w0.05: c119.086,74.805 r0.35
  lines w0.05: 118.539,92.458 119.539,92.458 ; 118.586,74.805 119.586,74.805 ; 119.039,91.958 119.039,92.958 ; 119.086,74.305 119.086,75.305

## Text inside footprints (layer, text, board x,y; h text height)
J1: Top Overlay "USB" at 90.932,85.219 h1.27 r270